# Altium PCB GPS track2_ar.PcbDoc (part 3 of 3)
Units mm, origin at the board's own origin, x right, y up, seen from the top; angles counter-clockwise.
Board outline 100 x 80 mm, 2 copper layers (Top Layer, Bottom Layer); 195 components, 113 nets, 611 pads, 306 vias.
Unrouted connection lines stored in the file: 1.
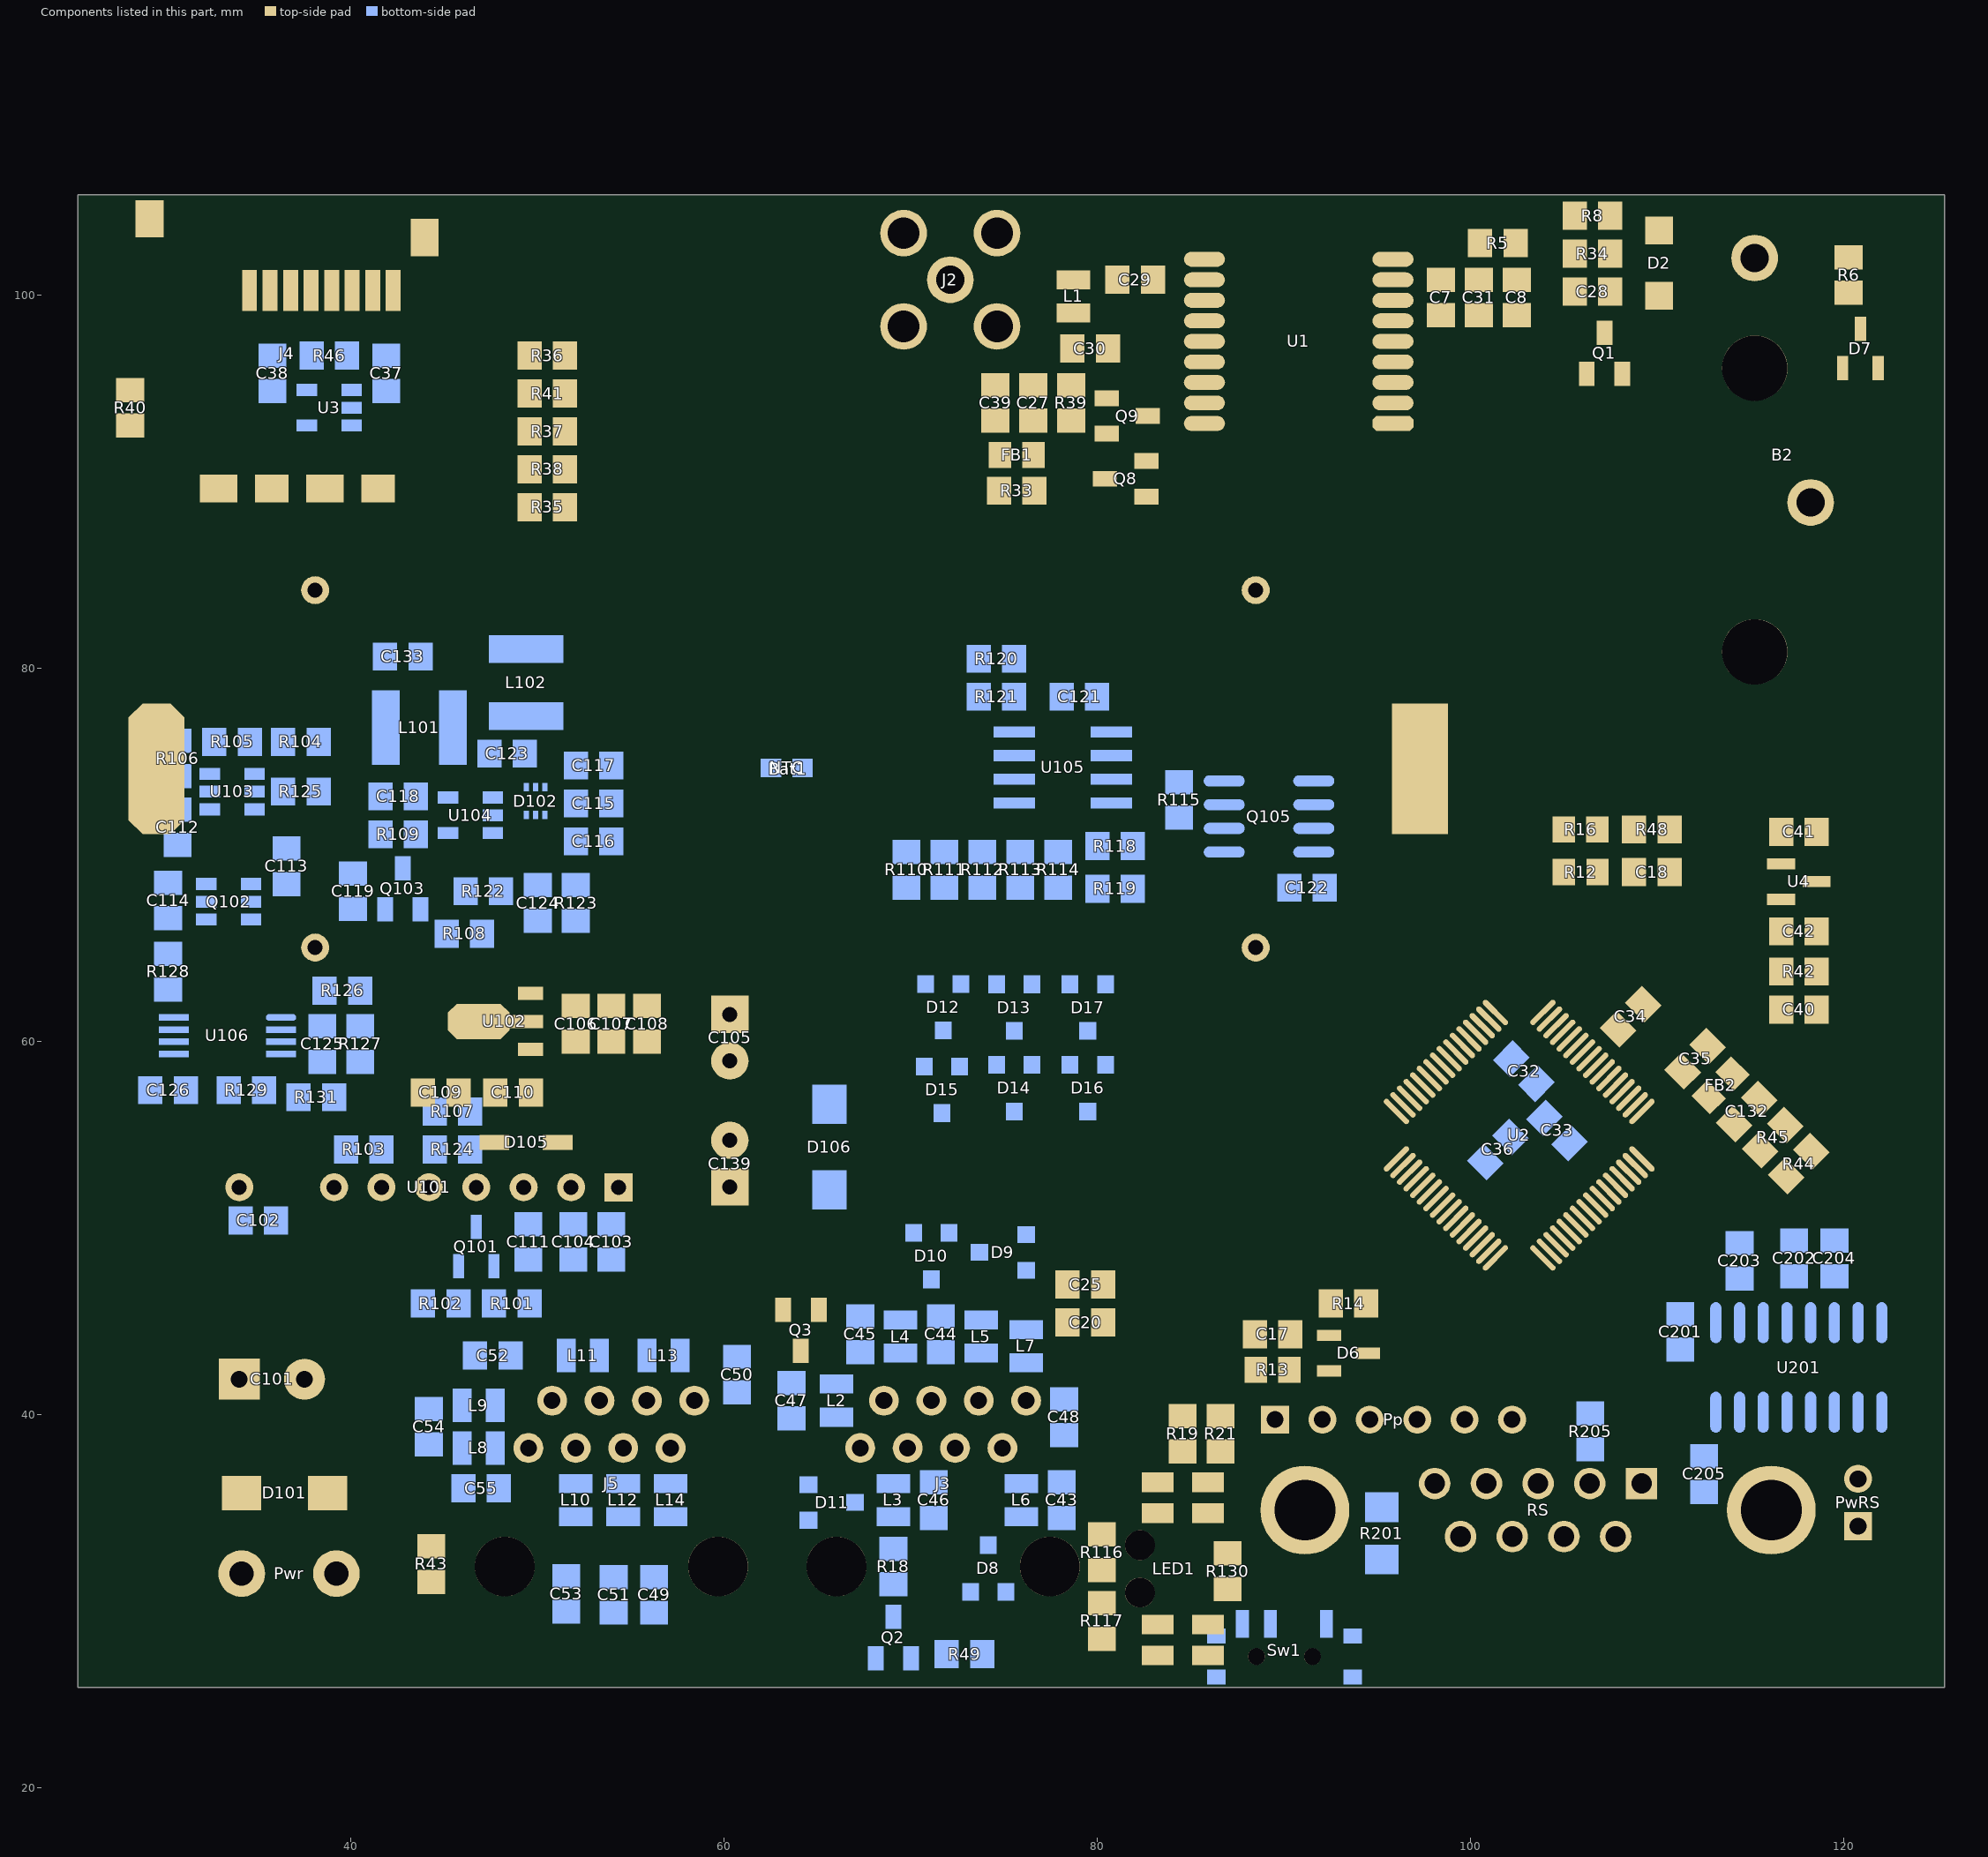
[diagram p3: the components of this part, seen from the top]

## Other copper (continued)
Bottom Layer:
  pour cut-out: 42.672,80.01 43.053,79.629 51.943,79.629 52.197,79.375 52.197,78.359 52.07,78.232 52.07,75.819 51.562,75.819 51.562,78.613 50.8,79.375 42.799,79.375 42.672,79.502
  pour cut-out: 79.69,74.041 79.69,77.216 79.055,77.851 78.105,77.851 78.105,74.229 78.42,73.914
  pour cut-out: 32.893,33.528 35.433,33.528 35.941,33.02 35.941,30.099 35.56,29.718 32.893,29.718 32.258,30.353 32.258,32.893
  pour cut-out: 68.072,75.184 68.961,75.184 68.961,74.168 68.072,74.168 65.024,71.12 60.325,71.12 59.055,72.39 59.055,76.962 60.325,78.232 65.024,78.232

## Silkscreen, mask and mechanical layers (free items; w line width, h text height)
Top Solder:
  text "GPS Track" at 87.249,87.757 h1
  text "Ver.2.0 Rev.00" at 84.963,86.487 h1
  text "Design by Charge" at 84.963,85.217 h1
Bottom Solder:
  text "GPS Track" at 66.294,102.489 h1.3
  text "Ver.2.0 Rev.00" at 66.294,100.076 h1.3
  text "Design by Charge" at 66.294,97.536 h1.3
Mechanical 1:
  the board outline again, w0.254
Mechanical 15:
  lines w0.127: 27.4,25.4 27.4,105.4 ; 123.4,25.4 123.4,105.4
  lines w0.254: 30.4,25.4 30.4,105.4 ; 120.4,25.4 120.4,105.4

## Dimensions
125.4,25.4 to 125.4,105.4 on Mechanical 13
25.4,25.4 to 125.4,25.4 on Mechanical 13

## Text inside footprints (layer, text, board x,y; h text height)
RS: Top Overlay "1" at 110.236,35.052 h1.5 r180; Top Overlay "5" at 98.044,34.798 h1.5 r180; Top Overlay "9" at 99.441,32.258 h1.5 r180; Top Overlay "6" at 108.966,32.131 h1.5 r180
U1: Top Overlay "Quectel" at 94.488,95.123 h1.2 r180